# Altium PCB LM-004-A.PcbDoc (part 1 of 2)
Units mil, origin at the board's own origin, x right, y up, seen from the top; angles counter-clockwise.
Board outline 2155 x 3832 mil, 4 copper layers (Top Layer, Signal Layer 2, Signal Layer 1, Bottom Layer), stack 30.635 mil thick; 82 components, 124 nets, 382 pads, 75 vias.
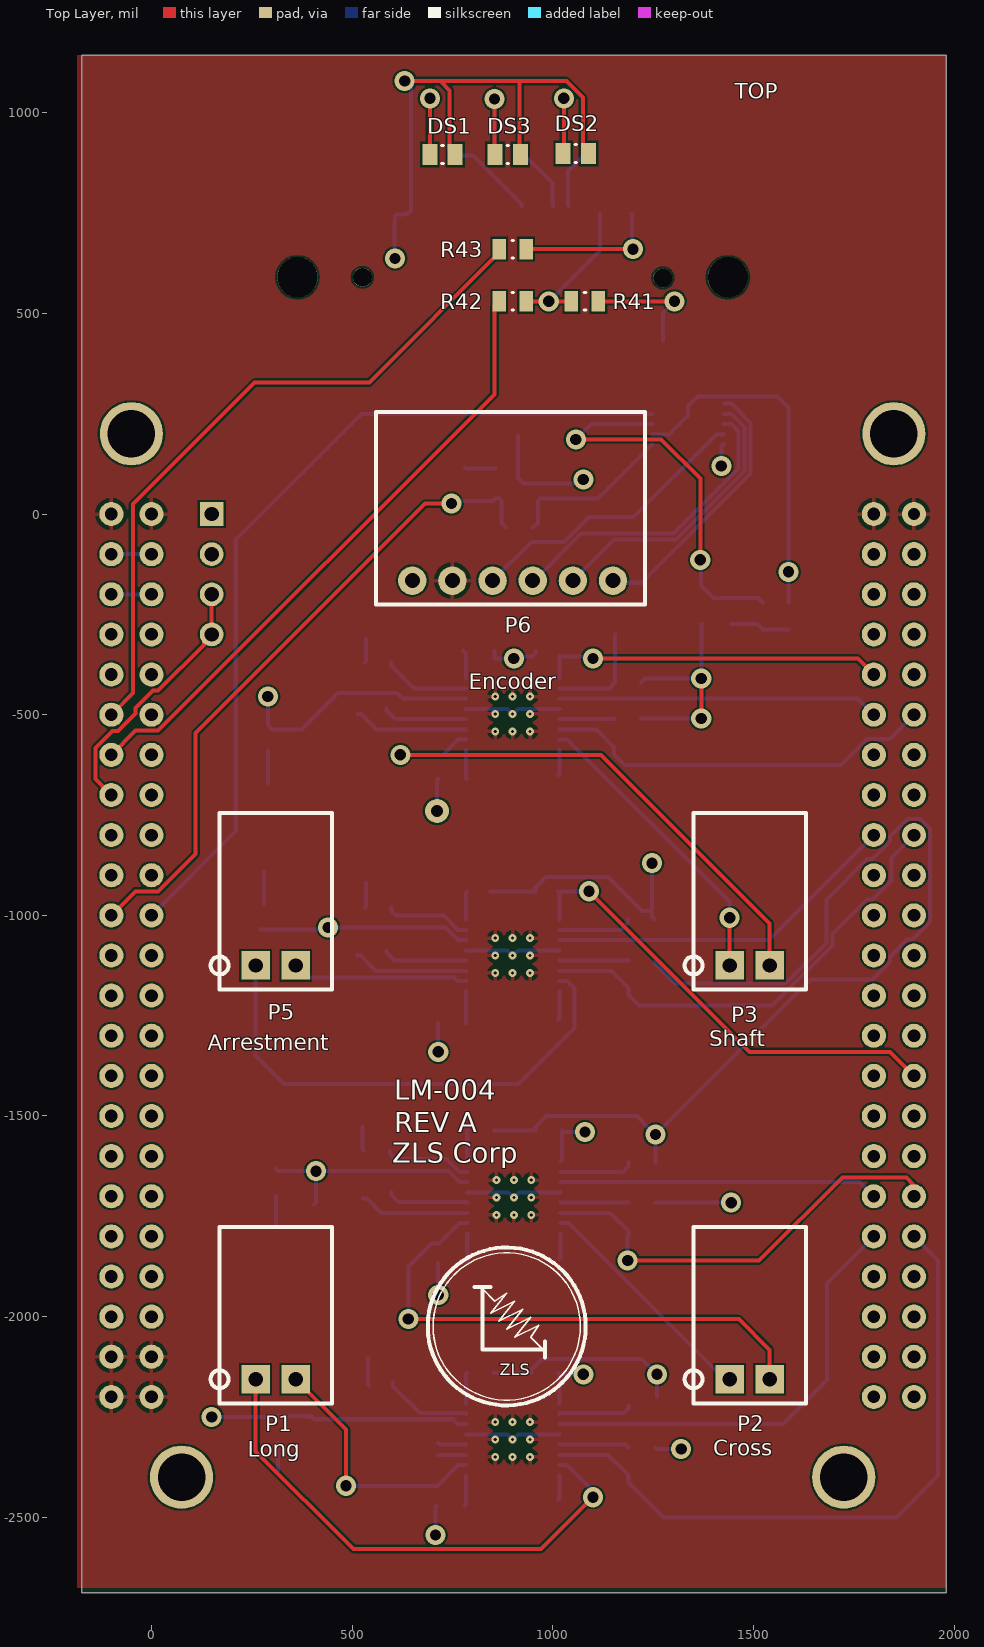
[diagram p0: Top Layer view]
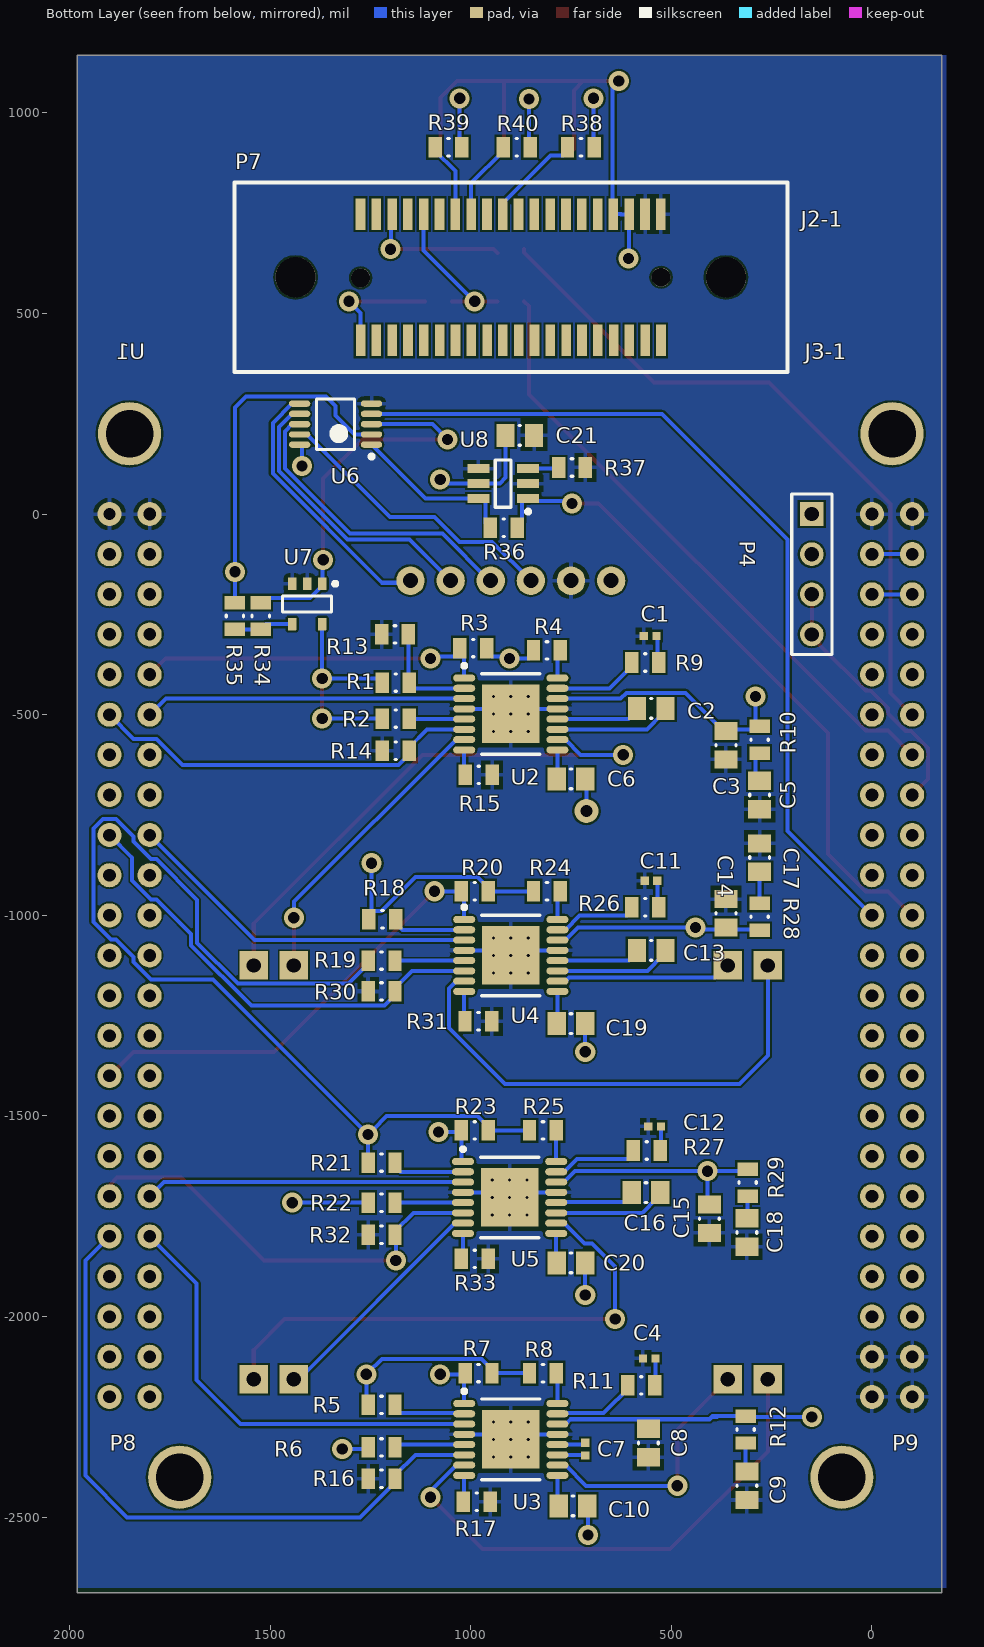
[diagram p1: Bottom Layer view, seen from below]
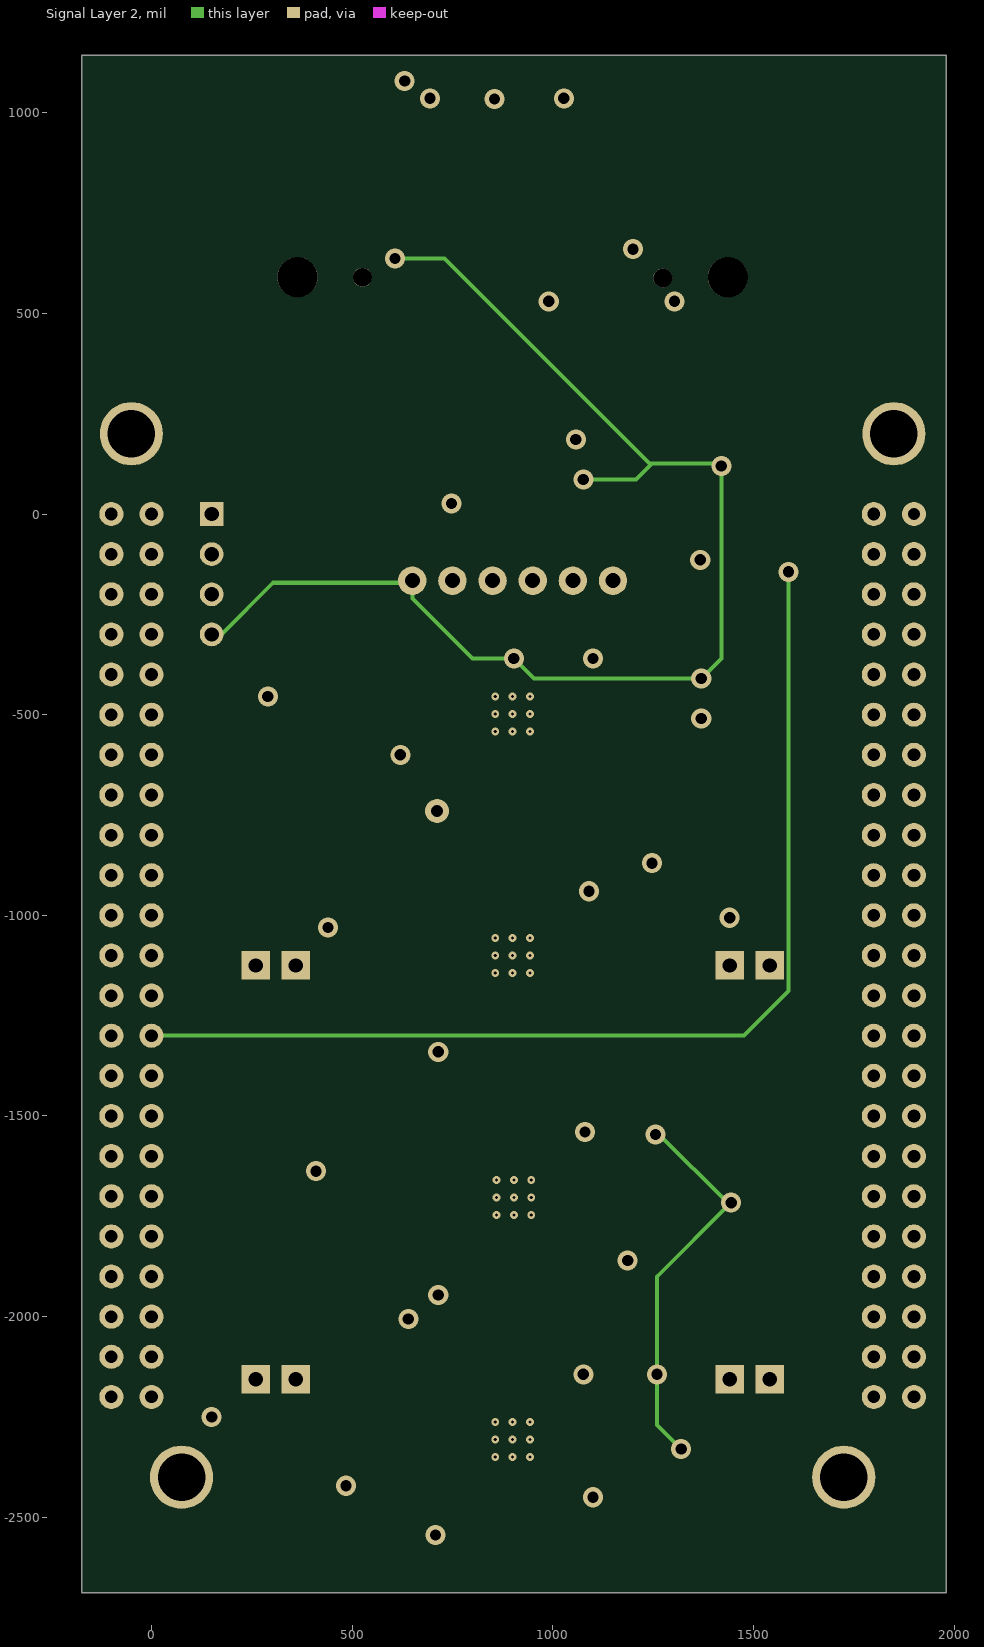
[diagram p2: Signal Layer 2]
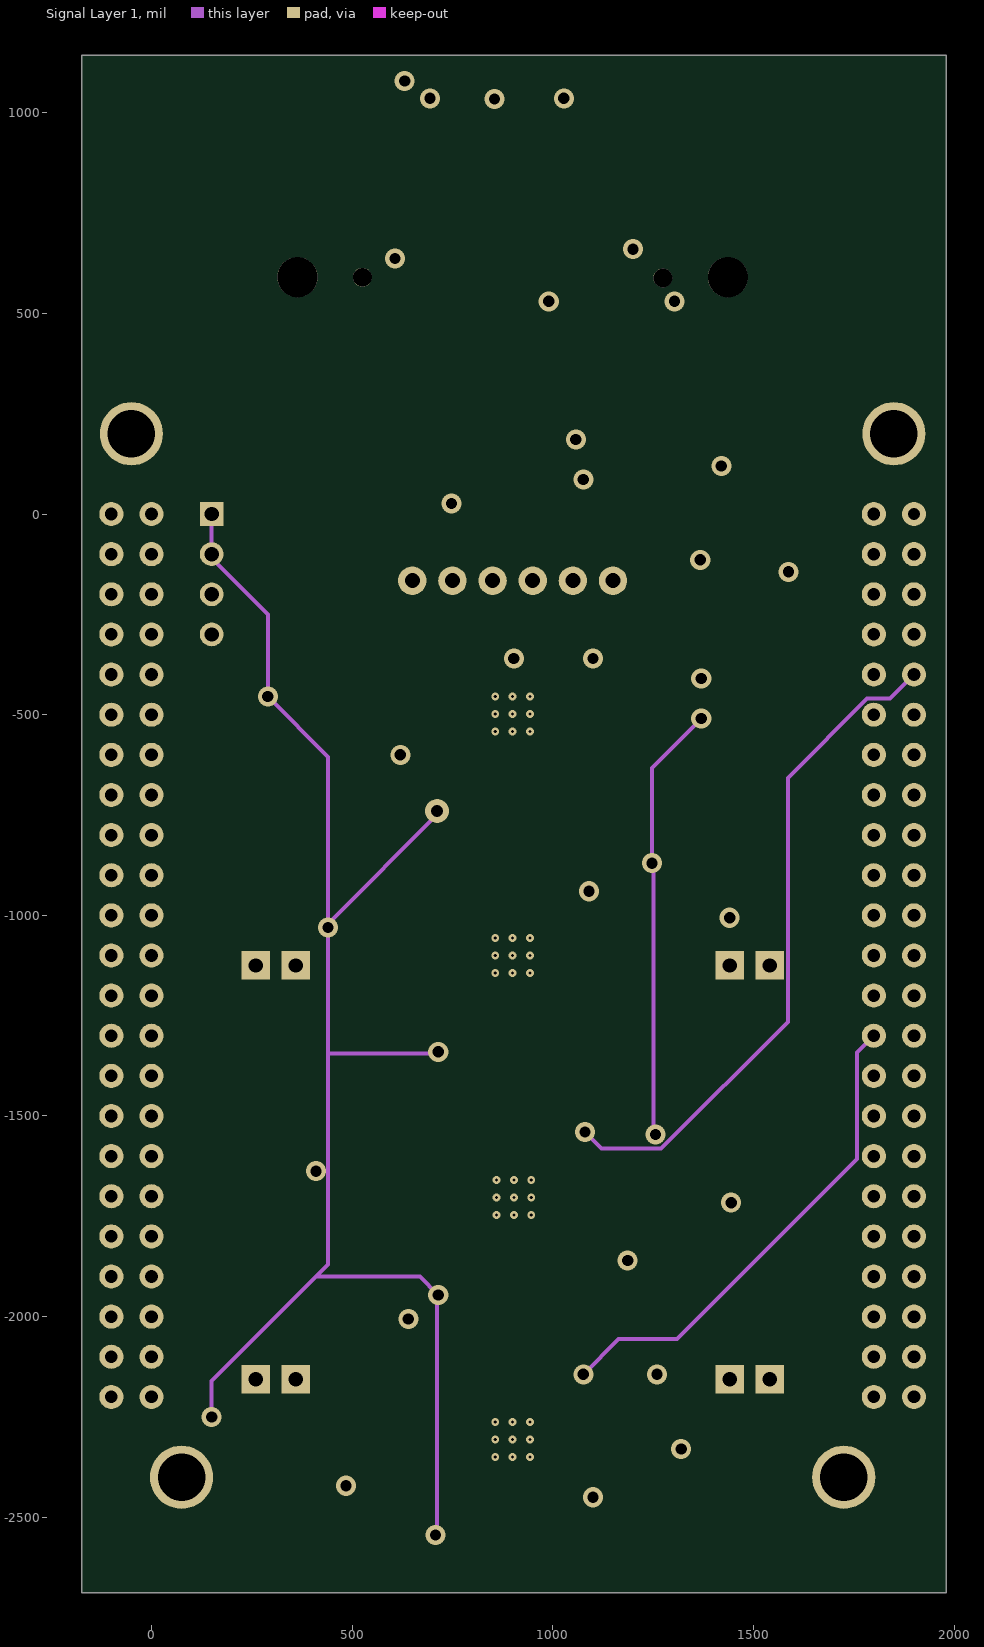
[diagram p3: Signal Layer 1]

## Layer stack, top to bottom
Top Solder: solder mask 0.4, Solder Resist, Dk 3.5
Top Layer: signal copper 1.4
Dielectric 1: core 10, FR-4, Dk 4.2
Signal Layer 2: signal copper 1.4173
Dielectric 4: prepreg 5, Dk 4.2
Signal Layer 1: signal copper 1.4173
Dielectric 3: core 10, Dk 4.2
Bottom Layer: signal copper 1.4
Bottom Solder: solder mask 0.4, Solder Resist, Dk 3.5

## Board outline
-174.24,-2688.39 1980.76,-2688.39 1980.76,1143.61 -174.24,1143.61

## Design rules (kind name [scope] priority, off if disabled: settings)
Clearance [All] p1: gap=5 ignorepadtopadclearanceinfootprint=FALSE
HoleSize [All] p1: absolutevalues=TRUE maxlimit=196.85 minlimit=1 maxpercent=80.000 minpercent=20.000
MinimumSolderMaskSliver [All] p1: minsoldermaskwidth=1.57
PolygonConnect [All] p1: connectstyle=Relief reliefconductorwidth=10 reliefentries=4 polygonreliefangle="90 Angle" airgapwidth=10
RoutingVias [All] p1: holewidth=28 width=50 viastyle="Through Hole" minholewidth=28 minwidth=50 maxholewidth=28 maxwidth=50
SilkToSolderMaskClearance [IsPad] p1: minsilkscreentomaskgap=3.94 clearancetoexposedcopper=TRUE
SolderMaskExpansion [All] p1: expansion=4
Width [All] p1: maxlimit=10 minlimit=10 preferedwidth=10
27 further rules are at their usual default settings.

## Classes and differential pairs
component class Encoder: C21 P6 R34 R35 R36 R37 U6 U7 U8
component class DC-Motor-DRV: C1 C2 C3 C4 C5 C6 C7 C8 C9 C10 C11 C12 C13 C14 C15 C16 C17 C18 C19 C20 R1 R2 R3 R4 R6 R7 R8 R9 R10 R11 R12 R13 R14 R15 R16 R17 R18 R19 R20 R21 R22 R23 R24 R25 R26 R27 R28 R29 R30 R31 R32 R33 U2 U3 U4 U5
component class BBB_Connections: P1 P2 P3 P4 P5 U1
component class Bluetooth: DS1 DS2 DS3 P7 R38 R39 R40 R41 R42 R43

## Components (designator, comment, footprint, x,y, rotation, side; value= is the part's Value field where it differs from the comment)
C1 "33nF" CAPC0402(1005)60_L 552.79,-304.01 r0 bottom
C2 "0.1uF" CAPC0805(2012)145_N 550,-484.2 r180 bottom
C3 "0.1uF" CAPC0805(2012)145_N 363.8,-576 r270 bottom
C4 "33nF" CAPC0402(1005)60_L 555.03,-2103.96 r0 bottom
C5 "4.7uF" CAPC0805(2012)145_N 280,-700 r270 bottom
C6 "0.1uF" CAPC0805(2012)145_N 750,-660 r180 bottom
C7 "CAP 1nF 25V 0402(1005)" CAPC0402(1005)60_L 714.57,-2330 r270 bottom value=1nF
C8 ".1uF" CAPC0805(2012)145_N 557.31,-2314.91 r270 bottom
C9 "4.7uF" CAPC0805(2012)145_N 311.86,-2421.44 r270 bottom
C10 ".1uF" CAPC0805(2012)145_N 745.03,-2471.44 r180 bottom
C11 "33nF" CAPC0402(1005)60_L 550.72,-914.01 r0 bottom
C12 "33nF" CAPC0402(1005)60_L 541.57,-1526 r0 bottom
C13 "CAP CER 0.1UF 25V X7R 0805" CAPC0805(2012)145_N 550,-1087.2 r180 bottom
C14 "CAP CER 0.1UF 25V X7R 0805" CAPC0805(2012)145_N 363.8,-994.76 r90 bottom
C15 "0.1uF" CAPC0805(2012)145_N 405.03,-1756 r270 bottom
C16 "0.1uF" CAPC0805(2012)145_N 563,-1691 r180 bottom
C17 "CAP CER 0.1UF 25V X7R 0805" CAPC0805(2012)145_N 280,-856 r90 bottom
C18 "4.7uF" CAPC0805(2012)145_N 311.86,-1790.31 r270 bottom
C19 "CAP CER 0.1UF 25V X7R 0805" CAPC0805(2012)145_N 750,-1270 r180 bottom
C20 "0.1uF" CAPC0805(2012)145_N 750,-1866 r180 bottom
C21 "CAP CER 0.1UF 25V X7R 0805" CAPC0805(2012)145_N 877.48,195.99 r180 bottom
DS1 "Lite-On LTST-S220KGKT Green LED, 571 nm 2012 (0805) Side View, Rectangle Lens SMD package" 0805C_L 725.24,895.99 r180 top
DS2 "Lite-On LTST-S220KGKT Green LED, 571 nm 2012 (0805) Side View, Rectangle Lens SMD package" 0805C_L 1057.48,898.23 r180 top
DS3 "Lite-On LTST-S220KGKT Green LED, 571 nm 2012 (0805) Side View, Rectangle Lens SMD package" 0805C_L 887.48,895.99 r180 top
P1 "IPL1-102-01-F-S-RA-K" IPL1-102-01-F-S-RA-K 309.45,-2156 r0 top
P2 "IPL1-102-01-F-S-RA-K" IPL1-102-01-F-S-RA-K 1490.55,-2156 r0 top locked
P3 "IPL1-102-01-F-S-RA-K" IPL1-102-01-F-S-RA-K 1490.55,-1124.9 r0 top locked
P4 "Header 4" HDR1X4 150,0 r270 bottom
P5 "IPL1-102-01-F-S-RA-K" IPL1-102-01-F-S-RA-K 309.45,-1124.9 r0 top locked
P6 "IPL1-106-01-L-S-RA-K" IPL1-106-01-L-S-RA-K 900,-166 r0 top locked
P7 "FSI-120-03-G-D-E-AB" FSI-120-03-G-D-E-AB 900,590 r180 bottom
R1 "10K" RESC0805(2012)_L 1186.54,-420 r180 bottom
R2 "10K" RESC0805(2012)_L 1186.54,-509.8 r180 bottom
R3 "10K" RESC0805(2012)_L 993.65,-334.01 r0 bottom
R4 "10K" RESC0805(2012)_L 810,-340 r180 bottom
R5 "10K" RESC0805(2012)_L 1222,-2219.98 r180 bottom
R6 "10K" RESC0805(2012)_L 1222,-2326 r180 bottom
R7 "10K" RESC0805(2012)_L 980.31,-2140.65 r0 bottom
R8 "10K" RESC0805(2012)_L 820,-2141 r180 bottom
R9 "10K" RESC0805(2012)_L 565.1,-370 r0 bottom
R10 "10K" RESC0805(2012)_L 280,-562.16 r270 bottom
R11 "10K" RESC0805(2012)_L 575.03,-2171.44 r0 bottom
R12 "10K" RESC0805(2012)_L 315.03,-2281.44 r270 bottom
R13 "DNP" RESC0805(2012)_L 1188.54,-300 r0 bottom
R14 "10K" RESC0805(2012)_L 1186.54,-590 r0 bottom
R15 "10K" RESC0805(2012)_L 980,-650 r180 bottom
R16 "10K" RESC0805(2012)_L 1222,-2403.96 r0 bottom
R17 "10K" RESC0805(2012)_L 985.03,-2461.44 r180 bottom
R18 "10K" RESC0805(2012)_L 1220,-1010 r180 bottom
R19 "10K" RESC0805(2012)_L 1222,-1112.8 r180 bottom
R20 "10K" RESC0805(2012)_L 990,-940 r0 bottom
R21 "10K" RESC0805(2012)_L 1222,-1616 r180 bottom
R22 "10K" RESC0805(2012)_L 1222,-1716 r180 bottom
R23 "10K" RESC0805(2012)_L 990,-1536 r0 bottom
R24 "10K" RESC0805(2012)_L 810,-940 r180 bottom
R25 "10K" RESC0805(2012)_L 820,-1536 r180 bottom
R26 "10K" RESC0805(2012)_L 565.1,-980 r0 bottom
R27 "10K" RESC0805(2012)_L 561.29,-1586 r0 bottom
R28 "10K" RESC0805(2012)_L 280,-1003.61 r90 bottom
R29 "10K" RESC0805(2012)_L 310,-1666 r270 bottom
R30 "10K" RESC0805(2012)_L 1222,-1189.57 r0 bottom
R31 "10K" RESC0805(2012)_L 980.69,-1264.01 r180 bottom
R32 "10K" RESC0805(2012)_L 1222,-1796 r0 bottom
R33 "10K" RESC0805(2012)_L 990,-1856 r180 bottom
R34 "10K" RESC0805(2012)_L 1523.24,-254.01 r90 bottom
R35 "10K" RESC0805(2012)_L 1587.48,-254.01 r270 bottom
R36 "DNP" RESC0805(2012)_L 917.48,-34.01 r0 bottom
R37 "43.2K" RESC0805(2012)_L 747.48,115.99 r180 bottom
R38 "3.9k" RESC0805(2012)_L 725.24,914 r180 bottom
R39 "3.9k" RESC0805(2012)_L 1055.24,914 r180 bottom
R40 "3.9k" RESC0805(2012)_L 885.24,914 r180 bottom
R41 "10K" RESC0805(2012)_L 1080,530 r180 top value=3.9k
R42 "100" RESC0805(2012)_L 900,530 r0 top value=3.9k
R43 "100" RESC0805(2012)_L 900,660 r0 top value=3.9k
U1 "BBB" "BEAGLEBONE BLACK MEZANINE" 900,-1100 r180 bottom locked
U2 "DRV8801PWPR" DRV8801PWPR 900,-498.18 r180 bottom
U3 "DRV8801PWPR" DRV8801PWPR 900,-2306 r180 bottom
U4 "DRV8801PWPR" DRV8801PWPR 900,-1100 r180 bottom locked
U5 "DRV8801PWPR" DRV8801PWPR 903,-1703 r180 bottom locked
U6 "MAX1484EUB+" MAX1486EUB+ 1336.65,224 r0 bottom
U7 "OPA188AIDBVT" DBV0005A_L 1407.48,-224.01 r270 bottom
U8 "LTC6994MPS6-2#TRMPBF" LTC6994MPS6-2#TRMPBF 918.98,75.99 r0 bottom

## Footprints (in the part's own frame and the unit in brackets; to place one, negate y for a bottom-side part, rotate by r counter-clockwise, add the part's x,y. Pads: shape width x height; smd on the part's side, far side on the other; paste and mask are expansions set on the pad)
0805C_L [mm]
  rect 0.95x1.35 smd: 1(-0.8,0) 2(0.8,0)
  silkscreen extent -0.05,-0.58 0.05,0.58, body extent -1.1,-0.72 1.1,0.72, height 0.75
"BEAGLEBONE BLACK MEZANINE" [mil]
  round 60 hole 31.5: 8-1(-900,1100) 8-3(-900,1000) 8-4(-1000,1000) 8-5(-900,900) 8-6(-1000,900) 8-7(-900,800) 8-8(-1000,800) 8-9(-900,700) 8-10(-1000,700) 8-11(-900,600) 8-12(-1000,600) 8-13(-900,500) 8-14(-1000,500) 8-15(-900,400) 8-16(-1000,400) 8-17(-900,300) 8-18(-1000,300) 8-19(-900,200) 8-20(-1000,200) 8-21(-900,100) 8-22(-1000,100) 8-23(-900,0) 8-24(-1000,0) 8-25(-900,-100) 8-26(-1000,-100) 8-27(-900,-200) 8-28(-1000,-200) 8-29(-900,-300) 8-30(-1000,-300) 8-31(-900,-400) 8-32(-1000,-400) 8-33(-900,-500) 8-34(-1000,-500) 8-35(-900,-600) 8-36(-1000,-600) 8-37(-900,-700) 8-38(-1000,-700) 8-39(-900,-800) 8-40(-1000,-800) 8-41(-900,-900) 8-42(-1000,-900) 8-43(-900,-1000) 8-44(-1000,-1000) 8-45(-900,-1100) 8-46(-1000,-1100) 9-1(1000,1100) 9-2(900,1100) 9-3(1000,1000) 9-4(900,1000) 9-5(1000,900) 9-6(900,900) 9-7(1000,800) 9-8(900,800) 9-9(1000,700) 9-10(900,700) 9-11(1000,600) 9-12(900,600) 9-13(1000,500) 9-14(900,500) 9-15(1000,400) 9-16(900,400) 9-17(1000,300) 9-18(900,300) 9-19(1000,200) 9-20(900,200) 9-21(1000,100) 9-22(900,100) 9-23(1000,0) 9-24(900,0) 9-25(1000,-100) 9-26(900,-100) 9-27(1000,-200) 9-28(900,-200) 9-29(1000,-300) 9-30(900,-300) 9-31(1000,-400) 9-32(900,-400) 9-33(1000,-500) 9-34(900,-500) 9-35(1000,-600) 9-36(900,-600) 9-37(1000,-700) 9-38(900,-700) 9-39(1000,-800) 9-40(900,-800) 9-41(1000,-900) 9-42(900,-900) 9-43(1000,-1000) 9-44(900,-1000) 9-45(1000,-1100) 9-46(900,-1100)
  round 60 hole 30 paste+0: 8-2(-1000,1100)
  round 157.48 hole 118.11 paste+0: ""(-950,1300)
  round 157.48 hole 118.11: ""(-825,-1300) ""(825,-1300) ""(950,1300)
  body extent -1047,-1163 1048,1157, height 335
CAPC0402(1005)60_L [mm] "Chip Capacitor, Body 1.0x0.5mm, Height 0.6mm, IPC High Density"
  rect 0.52x0.52 smd: 1(-0.4,0) 2(0.4,0)
  body extent -0.55,-0.3 0.55,0.3, height 0.6
CAPC0805(2012)145_N [mm] "Chip Capacitor, Body 2.0x1.2mm, Height 1.45mm, IPC Medium Density"
  rect 1.15x1.45 smd: 1(-0.9,0) 2(0.9,0)
  silkscreen extent -0.05,-0.63 0.05,0.63, body extent -1.1,-0.72 1.1,0.73, height 1.45
DBV0005A_L [mm] "SOT23, 5-Leads, Body 3.05x1.75mm, Pitch 0.95mm, IPC High Density"
  rrect18% 0.8x0.55 smd: 1(-1.275,0.95) 2(-1.275,0) 3(-1.275,-0.95) 4(1.275,-0.95) 5(1.275,0.95)
  silkscreen extent -1.4,-1.55 0.5,1.9, body extent -1.42,-1.46 1.42,1.46, height 1.08
DRV8801PWPR [mm] "IC MOTOR DRIVER PAR 16HTSSOP"
  oval 1.4x0.45 smd: 1(-2.95,2.275) 2(-2.95,1.625) 3(-2.95,0.975) 4(-2.95,0.325) 5(-2.95,-0.325) 6(-2.95,-0.975) 7(-2.95,-1.625) 8(-2.95,-2.275) 9(2.95,-2.275) 10(2.95,-1.625) 11(2.95,-0.975) 12(2.95,-0.325) 13(2.95,0.325) 14(2.95,0.975) 15(2.95,1.625) 16(2.95,2.275)
  rect 3.65x3.7 smd: 17(0,0)
  silkscreen extent -3.08,-2.55 1.85,3.17, body extent -3.2,-2.55 3.2,2.55, height 1.2
FSI-120-03-G-D-E-AB [mil]
  round 100 hole 100: hole(-536.2,0) hole(536.2,0)
  round 47 hole 47: hole(-374.3,-1.6) hole(374.3,0)
  rect 24x78.74 smd: J2-1(373.91,157.36) J2-2(334.51,157.36) J2-3(295.11,157.36) J2-4(255.71,157.36) J2-5(216.31,157.36) J2-6(176.91,157.36) J2-7(137.51,157.36) J2-8(98.11,157.36) J2-9(58.71,157.36) J2-10(19.31,157.36) J2-11(-20.09,157.36) J2-12(-59.49,157.36) J2-13(-98.89,157.36) J2-14(-138.29,157.36) J2-15(-177.69,157.36) J2-16(-217.09,157.36) J2-17(-256.49,157.36) J2-18(-295.89,157.36) J2-19(-335.29,157.36) J2-20(-374.69,157.36) J3-1(374.3,-157.36) J3-2(334.9,-157.36) J3-3(295.5,-157.36) J3-4(256.1,-157.36) J3-5(216.7,-157.36) J3-6(177.3,-157.36) J3-7(137.9,-157.36) J3-8(98.5,-157.36) J3-9(59.1,-157.36) J3-10(19.7,-157.36) J3-11(-19.7,-157.36) J3-12(-59.1,-157.36) J3-13(-98.5,-157.36) J3-14(-137.9,-157.36) J3-15(-177.3,-157.36) J3-16(-216.7,-157.36) J3-17(-256.1,-157.36) J3-18(-295.5,-157.36) J3-19(-334.9,-157.36) J3-20(-374.3,-157.36)
  silkscreen extent -689,-236 689,236, body extent -633,-179 710,188, height 162
HDR1X4 [mm] "Connector; Header; 4 Position"
  rect 1.5x1.5 hole 0.9: 1(0,0)
  round 1.5 hole 0.9: 2(2.54,0) 3(5.08,0) 4(7.62,0)
  silkscreen extent -1.27,-1.27 8.89,1.27
IPL1-102-01-F-S-RA-K [mm] ".100 TERMINAL ASSEMBLY"
  rect 1.8x1.8 hole 0.91: 1(-1.27,0) 2(1.27,0)
  silkscreen extent -4.12,-1.52 3.56,9.65, body extent -3.3,-0.32 3.3,9.4, height 6.56
IPL1-106-01-L-S-RA-K [mm]
  round 1.8 hole 0.95: 1(-6.35,0) 2(-3.81,0) 3(-1.27,0) 4(1.27,0) 5(3.81,0) 6(6.35,0)
  silkscreen extent -8.64,-1.52 8.38,10.67, body extent -8.38,-0.25 8.38,10.41, height 6.56
LTC6994MPS6-2#TRMPBF [mm] "SOT23, 6-Leads, Body 2.90x3.23mm, Pitch 0.95mm, IPC Medium Density"
  rect 1.4x0.55 smd: 1(-1.575,0.95) 2(-1.575,0) 3(-1.575,-0.95) 4(1.575,-0.95) 5(1.575,0) 6(1.575,0.95)
  silkscreen extent -1.7,-1.5 0.5,1.9, body extent -1.93,-1.5 1.92,1.5, height 1
MAX1486EUB+ [mm]
  oval 1.35x0.4 smd: 1(-2.275,1.3) 2(-2.275,0.65) 3(-2.275,0) 4(-2.275,-0.65) 5(-2.275,-1.3) 6(2.275,-1.3) 7(2.275,-0.65) 8(2.275,0) 9(2.275,0.65) 10(2.275,1.3)
  silkscreen extent -2.4,-1.6 1.2,2.17, body extent -2.45,-1.6 2.45,1.6, height 1.09
RESC0805(2012)_L [mm] "Chip Resistor, Body 2.0x1.3mm, IPC High Density"
  rect 0.85x1.3 smd: 1(-0.85,0) 2(0.85,0)
  silkscreen extent -0.05,-0.55 0.05,0.55, body extent -1.1,-0.67 1.1,0.68, height 0.7

## Part data
C1 C11: library part CMP-1034-00252-1, "CAP CER 0.1UF 10V X7R 0402", Manufacturer="Murata Electronics North America", Manufacturer Part Number=GRM155R71A104KA01D, Operating Temperature="-55°C ~ 125°C", Package / Case="0402 (1005 Metric)", Ratings=-, Supplier Part Number 1=490-6321-1-ND, Temperature Coefficient=X7R, Tolerance=±10%, Voltage - Rated=10V, Applications="General Purpose", Category=Capacitors, ComponentLink1Description=http://www.murata.com/~/media/webrenewal/support/library/catalog/products/capacitor/mlcc/c02e.ashx?la=en-us, ComponentLink1URL=http://www.murata.com/~/media/webrenewal/support/library/catalog/products/capacitor/mlcc/c02e.ashx?la=en-us, Features=-, Height - Seated (Max)=-, Lead Spacing=-, Mounting Type="Surface Mount, MLCC", Packaging="Cut Tape (CT)", Part Status=Active, Pricing 1="1=0.1, 10=0.014, 100=0.0063, 500=0.00446, 1000=0.00351, 2500=0.00319, 5000=0.00293 (USD)", RoHS="RoHS Compliant", Size / Dimension="0.039\" L x 0.020\" W (1.00mm x 0.50mm)", Stock 1=2920395, Supplier 1=Digi-Key, Thickness (Max)="0.022\" (0.55mm)"
C2 C3 C6 C8 C10 C15 C16 C20: library part CMP-1036-04795-1, "CAP CER 0.1UF 25V X7R 0805", Capacitance=0.1µF, Manufacturer="Murata Electronics North America", Manufacturer Part Number=GRM21BR71E104KA01L, Operating Temperature="-55°C ~ 125°C", Package / Case="0805 (2012 Metric)", Ratings=-, Supplier Part Number 1=490-1673-6-ND, Temperature Coefficient=X7R, Tolerance=±10%, Voltage - Rated=25V, Applications="General Purpose", Category=Capacitors, ComponentLink1Description=http://www.murata.com/~/media/webrenewal/support/library/catalog/products/capacitor/mlcc/c02e.ashx, ComponentLink1URL=http://www.murata.com/~/media/webrenewal/support/library/catalog/products/capacitor/mlcc/c02e.ashx, Features=-, Height - Seated (Max)=-, Lead Spacing=-, Lead Style=-, Mounting Type="Surface Mount, MLCC", Packaging=Digi-Reel®, Part Status=Active, Pricing 1="1=0.2, 10=0.145, 100=0.0683, 500=0.04788, 1000=0.03964 (USD)", RoHS="RoHS Compliant", Size / Dimension="0.079\" L x 0.049\" W (2.00mm x 1.25mm)", Stock 1=891652, Supplier 1=Digi-Key, Thickness (Max)="0.053\" (1.35mm)"
C4: library part CMP-1034-00252-1, "CAP CER 33UF 10V X7R 0402", Manufacturer="Murata Electronics North America", Manufacturer Part Number=GRM155R71A104KA01D, Operating Temperature="-55°C ~ 125°C", Package / Case="0402 (1005 Metric)", Ratings=-, Supplier Part Number 1=490-6321-1-ND, Temperature Coefficient=X7R, Tolerance=±10%, Voltage - Rated=10V, Applications="General Purpose", Category=Capacitors, ComponentLink1Description=http://www.murata.com/~/media/webrenewal/support/library/catalog/products/capacitor/mlcc/c02e.ashx?la=en-us, ComponentLink1URL=http://www.murata.com/~/media/webrenewal/support/library/catalog/products/capacitor/mlcc/c02e.ashx?la=en-us, Features=-, Height - Seated (Max)=-, Lead Spacing=-, Mounting Type="Surface Mount, MLCC", Packaging="Cut Tape (CT)", Part Status=Active, Pricing 1="1=0.1, 10=0.014, 100=0.0063, 500=0.00446, 1000=0.00351, 2500=0.00319, 5000=0.00293 (USD)", RoHS="RoHS Compliant", Size / Dimension="0.039\" L x 0.020\" W (1.00mm x 0.50mm)", Stock 1=2920395, Supplier 1=Digi-Key, Thickness (Max)="0.022\" (0.55mm)"
C5: library part CMP-1036-04795-1, "CAP CER 4.7UF 25V 10% X7R 0805", Capacitance=4.7µF, Manufacturer="Murata Electronics North America", Manufacturer Part Number=GRM21BR71E104KA01L, Operating Temperature="-55°C ~ 125°C", Package / Case="0805 (2012 Metric)", Ratings=-, Supplier Part Number 1=490-1673-6-ND, Temperature Coefficient=X7R, Tolerance=±10%, Voltage - Rated=25V, Applications="General Purpose", Category=Capacitors, ComponentLink1Description=http://www.murata.com/~/media/webrenewal/support/library/catalog/products/capacitor/mlcc/c02e.ashx, ComponentLink1URL=http://www.murata.com/~/media/webrenewal/support/library/catalog/products/capacitor/mlcc/c02e.ashx, Features=-, Height - Seated (Max)=-, Lead Spacing=-, Lead Style=-, Mounting Type="Surface Mount, MLCC", Packaging=Digi-Reel®, Part Status=Active, Pricing 1="1=0.2, 10=0.145, 100=0.0683, 500=0.04788, 1000=0.03964 (USD)", RoHS="RoHS Compliant", Size / Dimension="0.079\" L x 0.049\" W (2.00mm x 1.25mm)", Stock 1=891652, Supplier 1=Digi-Key, Thickness (Max)="0.053\" (1.35mm)"
C7: library part CMP-1034-01622-1, "CAP 1nF 25V ±10% 0402 (1005 Metric) Thickness 0.6mm SMD", Case-EIA=0402, Case-Metric=1005, Rated Voltage="25 V", Tolerance=±10%, Max Thickness="0.6 mm", Technology=SMT
C9 C18: library part CMP-1036-04795-1, "CAP CER 4.7UF 25V X7R 0805", Capacitance=4.7µF, Manufacturer="Murata Electronics North America", Manufacturer Part Number=GRM21BR71E104KA01L, Operating Temperature="-55°C ~ 125°C", Package / Case="0805 (2012 Metric)", Ratings=-, Supplier Part Number 1=490-1673-6-ND, Temperature Coefficient=X7R, Tolerance=±10%, Voltage - Rated=25V, Applications="General Purpose", Category=Capacitors, ComponentLink1Description=http://www.murata.com/~/media/webrenewal/support/library/catalog/products/capacitor/mlcc/c02e.ashx, ComponentLink1URL=http://www.murata.com/~/media/webrenewal/support/library/catalog/products/capacitor/mlcc/c02e.ashx, Features=-, Height - Seated (Max)=-, Lead Spacing=-, Lead Style=-, Mounting Type="Surface Mount, MLCC", Packaging=Digi-Reel®, Part Status=Active, Pricing 1="1=0.2, 10=0.145, 100=0.0683, 500=0.04788, 1000=0.03964 (USD)", RoHS="RoHS Compliant", Size / Dimension="0.079\" L x 0.049\" W (2.00mm x 1.25mm)", Stock 1=891652, Supplier 1=Digi-Key, Thickness (Max)="0.053\" (1.35mm)"
C12: library part CMP-1034-00252-1, "CAP CER 3.3UF 10V X7R 0402", Manufacturer="Murata Electronics North America", Manufacturer Part Number=GRM155R71A104KA01D, Operating Temperature="-55°C ~ 125°C", Package / Case="0402 (1005 Metric)", Ratings=-, Supplier Part Number 1=490-6321-1-ND, Temperature Coefficient=X7R, Tolerance=±10%, Voltage - Rated=10V, Applications="General Purpose", Category=Capacitors, ComponentLink1Description=http://www.murata.com/~/media/webrenewal/support/library/catalog/products/capacitor/mlcc/c02e.ashx?la=en-us, ComponentLink1URL=http://www.murata.com/~/media/webrenewal/support/library/catalog/products/capacitor/mlcc/c02e.ashx?la=en-us, Features=-, Height - Seated (Max)=-, Lead Spacing=-, Mounting Type="Surface Mount, MLCC", Packaging="Cut Tape (CT)", Part Status=Active, Pricing 1="1=0.1, 10=0.014, 100=0.0063, 500=0.00446, 1000=0.00351, 2500=0.00319, 5000=0.00293 (USD)", RoHS="RoHS Compliant", Size / Dimension="0.039\" L x 0.020\" W (1.00mm x 0.50mm)", Stock 1=2920395, Supplier 1=Digi-Key, Thickness (Max)="0.022\" (0.55mm)"
C13 C14 C19 C21: library part CMP-1036-04795-1, Capacitance=0.1µF, Manufacturer="Murata Electronics North America", Manufacturer Part Number=GRM21BR71E104KA01L, Operating Temperature="-55°C ~ 125°C", Package / Case="0805 (2012 Metric)", Ratings=-, Supplier Part Number 1=490-1673-6-ND, Temperature Coefficient=X7R, Tolerance=±10%, Voltage - Rated=25V, Applications="General Purpose", Category=Capacitors, ComponentLink1Description=http://www.murata.com/~/media/webrenewal/support/library/catalog/products/capacitor/mlcc/c02e.ashx, ComponentLink1URL=http://www.murata.com/~/media/webrenewal/support/library/catalog/products/capacitor/mlcc/c02e.ashx, Features=-, Height - Seated (Max)=-, Lead Spacing=-, Lead Style=-, Mounting Type="Surface Mount, MLCC", Packaging=Digi-Reel®, Part Status=Active, Pricing 1="1=0.2, 10=0.145, 100=0.0683, 500=0.04788, 1000=0.03964 (USD)", RoHS="RoHS Compliant", Size / Dimension="0.079\" L x 0.049\" W (2.00mm x 1.25mm)", Stock 1=891652, Supplier 1=Digi-Key, Thickness (Max)="0.053\" (1.35mm)"
C17: library part CMP-1036-04795-1, "CAP CER 0.47UF 25V X7R 0805", Capacitance=4.7µF, Manufacturer="Murata Electronics North America", Manufacturer Part Number=GRM21BR71E104KA01L, Operating Temperature="-55°C ~ 125°C", Package / Case="0805 (2012 Metric)", Ratings=-, Supplier Part Number 1=490-1673-6-ND, Temperature Coefficient=X7R, Tolerance=±10%, Voltage - Rated=25V, Applications="General Purpose", Category=Capacitors, ComponentLink1Description=http://www.murata.com/~/media/webrenewal/support/library/catalog/products/capacitor/mlcc/c02e.ashx, ComponentLink1URL=http://www.murata.com/~/media/webrenewal/support/library/catalog/products/capacitor/mlcc/c02e.ashx, Features=-, Height - Seated (Max)=-, Lead Spacing=-, Lead Style=-, Mounting Type="Surface Mount, MLCC", Packaging=Digi-Reel®, Part Status=Active, Pricing 1="1=0.2, 10=0.145, 100=0.0683, 500=0.04788, 1000=0.03964 (USD)", RoHS="RoHS Compliant", Size / Dimension="0.079\" L x 0.049\" W (2.00mm x 1.25mm)", Stock 1=891652, Supplier 1=Digi-Key, Thickness (Max)="0.053\" (1.35mm)"
DS1 DS2 DS3: library part "LED A/K", Case/Package=0805, Case Code (Metric)=2012, Colour=Green, Forward Current=20mA, Forward Voltage=2V, Lens Colour=Colorless, Manufacturer="Vishay / Lite-On", Manufacturer Part Number=LTST-S220KGKT, Max Operating Temperature=85°C, Min Operating Temperature=-55°C, Package Quantity=4000, Power Dissipation=75W, Power Rating=75mW, Supplier Part Number 1=160-1468-1-ND, Case Code (Imperial)=0805, ComponentLink1Description=https://datasheet.ciiva.com/11775/0900766b80dc0b70-11775441.pdf, ComponentLink1URL=https://datasheet.ciiva.com/11775/0900766b80dc0b70-11775441.pdf, ComponentLink2Description=https://datasheet.ciiva.com/2110/s-110-ltst-s220kgkt-2110069.pdf, ComponentLink2URL=https://datasheet.ciiva.com/2110/s-110-ltst-s220kgkt-2110069.pdf, ComponentLink3Description=https://datasheet.ciiva.com/2110/s-110-ltst-s220kgkt-2110070.pdf, ComponentLink3URL=https://datasheet.ciiva.com/2110/s-110-ltst-s220kgkt-2110070.pdf, ComponentLink4Description=https://datasheet.ciiva.com/12400/100-ltst-s220kgkt-59602-12400886.pdf, ComponentLink4URL=https://datasheet.ciiva.com/12400/100-ltst-s220kgkt-59602-12400886.pdf, ComponentLink5Description=https://datasheet.ciiva.com/2110/s-110-ltst-s220kgkt-2110071.pdf, ComponentLink5URL=https://datasheet.ciiva.com/2110/s-110-ltst-s220kgkt-2110071.pdf, ComponentLink6Description=https://datasheet.ciiva.com/16379/ltst-s220kgkt-16379082.pdf, ComponentLink6URL=https://datasheet.ciiva.com/16379/ltst-s220kgkt-16379082.pdf, ComponentLink7Description=http://www.farnell.com/cad/2124774.pdf, ComponentLink7URL=http://www.farnell.com/cad/2124774.pdf, ComponentLink8Description=http://www.farnell.com/datasheets/693084.pdf, ComponentLink8URL=http://www.farnell.com/datasheets/693084.pdf, Depth=0.6mm, Dominant Wavelength=568nm, Height=0.6mm, Illumination Colour=Green, Lead Free="Lead Free", Length=2.1mm, Lens Style=Diffused,Colorless, Lens Transparency=Clear, Luminous Intensity=35mcd, Mount="Surface Mount", Number of Elements=1, Number of LEDs=1, Number of Pins=2, Packaging="Tape and Reel", Pricing 1="1=0.29, 10=0.212, 25=0.1564, 100=0.1117, 250=0.0759, 500=0.067, 1000=0.0525 (USD)", Pricing 2="1=0.325, 10=0.317, 100=0.23, 200=0.228, 400=0.182, 900=0.147, 3000=0.114, 9000=0.107 (GBP)", Radiation Hardening=No, RoHS=YES, Stock 1=74800, Stock 2=2271, Supplier 1=Digi-Key, Supplier 2=Farnell, Supplier Part Number 2=2062310, Test Current=20mA, Viewing Angle=130°, Wavelength=574nm, Width=1mm
P1 P2 P3 P5: Current Rating=-, Insulation Color=Natural, Manufacturer="Samtec Inc.", Material Flammability Rating="UL94 V-0", Operating Temperature="-55°C ~ 125°C", Supplier Part Number 1=IPL1-102-01-F-S-RA-K-ND, Voltage Rating="675VAC, 954VDC", Applications=-, Category="Connectors, Interconnects", ComponentLink1Description=http://suddendocs.samtec.com/prints/ipl1-1xx-xx-xxx-s-xx-x-xx-mkt.pdf, ComponentLink1URL=http://suddendocs.samtec.com/prints/ipl1-1xx-xx-xxx-s-xx-x-xx-mkt.pdf, Connector Type=Header, Contact Finish - Mating=Gold, Contact Finish - Post=Tin, Contact Finish Thickness - Mating="3.00µin (0.076µm)", Contact Finish Thickness - Post=-, Contact Length - Mating="0.215\" (5.46mm)", Contact Length - Post="0.085\" (2.16mm)", Contact Material="Phosphor Bronze", Contact Shape=Square, Contact Type="Male Pin", Fastening Type="Locking Ramp", Features=-, Ingress Protection=-, Insulation Height="0.240\" (6.10mm)", Insulation Material="Liquid Crystal Polymer (LCP)", Manufacturer Part Number=IPL1-102-01-F-S-RA-K, Mated Stacking Heights=-, Mounting Type="Through Hole, Right Angle", Number of Positions=2, Number of Positions Loaded=All, Number of Rows=1, Overall Contact Length=-, Packaging=Tube, Part Status=Active, Pitch - Mating="0.100\" (2.54mm)", Pricing 1="1=2.09 (USD)", RoHS="RoHS Compliant", Row Spacing - Mating=-, Shrouding="Shrouded - 4 Wall", Stock 1=0, Style="Board to Cable/Wire", Supplier 1=Digi-Key, Termination=Solder
P4: "Header, 4-Pin", LatestRevisionDate=17-Jul-2002, LatestRevisionNote="Re-released for DXP Platform.", Publisher="Altium Limited"
P6: library part "Header 6", "Header, 6-Pin", Current Rating=-, Insulation Color=Natural, Manufacturer="Samtec Inc.", Material Flammability Rating="UL94 V-0", Operating Temperature="-55°C ~ 125°C", Supplier Part Number 1=SAM9602-ND, Voltage Rating="675VAC, 954VDC", Applications=-, Category="Connectors, Interconnects", ComponentLink1Description=http://suddendocs.samtec.com/prints/ipl1-1xx-xx-xxx-s-xx-x-xx-mkt.pdf, ComponentLink1URL=http://suddendocs.samtec.com/prints/ipl1-1xx-xx-xxx-s-xx-x-xx-mkt.pdf, Connector Type=Header, Contact Finish - Mating=Gold, Contact Finish - Post=Tin, Contact Finish Thickness - Mating="10.0µin (0.25µm)", Contact Finish Thickness - Post=-, Contact Length - Mating="0.215\" (5.46mm)", Contact Length - Post="0.085\" (2.16mm)", Contact Material="Phosphor Bronze", Contact Shape=Square, Contact Type="Male Pin", Fastening Type="Locking Ramp", Features=-, Ingress Protection=-, Insulation Height="0.240\" (6.10mm)", Insulation Material="Liquid Crystal Polymer (LCP)", Manufacturer Part Number=IPL1-106-01-L-S-RA-K, Mated Stacking Heights=-, Mounting Type="Through Hole, Right Angle", Number of Positions=6, Number of Positions Loaded=All, Number of Rows=1, Overall Contact Length=-, Packaging=Tube, Part Status=Active, Pitch - Mating="0.100\" (2.54mm)", Pricing 1="1=2.73, 34=2.39794, 102=2.18, 510=1.853, 1020=1.5805, 5032=1.417 (USD)", RoHS="RoHS Compliant", Row Spacing - Mating=-, Shrouding="Shrouded - 4 Wall", Stock 1=6, Style="Board to Cable/Wire", Supplier 1=Digi-Key, Termination=Solder
R1 R2 R3 R4 R5 R6 R7 R8 R9 R11 R13 R14 R15 R16 R17 R18 R19 R20 R21 R22 R23 R24 R25 R26 R27 R30 R31 R32 R33 R34 R35: library part CMP-1013-00215-1, "RES SMD 10K OHM 1% 1/8W 0805", Manufacturer="Vishay Dale", Manufacturer Part Number=CRCW080510K0FKEA, Operating Temperature="-55°C ~ 155°C", Package / Case="0805 (2012 Metric)", Power (Watts)="0.125W, 1/8W", Supplier Device Package=0805, Supplier Part Number 1=541-10.0KCCT-ND, Temperature Coefficient=±100ppm/°C, Tolerance=±1%, Category=Resistors, ComponentLink1Description=http://www.vishay.com/docs/20035/dcrcwe3.pdf, ComponentLink1URL=http://www.vishay.com/docs/20035/dcrcwe3.pdf, Composition="Thick Film", Failure Rate=-, Features="Automotive AEC-Q200", Height - Seated (Max)="0.020\" (0.50mm)", Packaging="Cut Tape (CT)", Part Status=Active, Pricing 1="1=0.1, 10=0.055, 100=0.0223, 1000=0.01003, 2500=0.0087 (USD)", RoHS="RoHS Compliant", Size / Dimension="0.079\" L x 0.049\" W (2.00mm x 1.25mm)", Stock 1=1104982, Supplier 1=Digi-Key
R10 R12 R28 R29: library part CMP-1013-00215-1, "RES SMD 1R OHM 1% 1/8W 0805", Manufacturer="Vishay Dale", Manufacturer Part Number=CRCW080510K0FKEA, Operating Temperature="-55°C ~ 155°C", Package / Case="0805 (2012 Metric)", Power (Watts)="0.125W, 1/8W", Supplier Device Package=0805, Supplier Part Number 1=541-10.0KCCT-ND, Temperature Coefficient=±100ppm/°C, Tolerance=±1%, Category=Resistors, ComponentLink1Description=http://www.vishay.com/docs/20035/dcrcwe3.pdf, ComponentLink1URL=http://www.vishay.com/docs/20035/dcrcwe3.pdf, Composition="Thick Film", Failure Rate=-, Features="Automotive AEC-Q200", Height - Seated (Max)="0.020\" (0.50mm)", Packaging="Cut Tape (CT)", Part Status=Active, Pricing 1="1=0.1, 10=0.055, 100=0.0223, 1000=0.01003, 2500=0.0087 (USD)", RoHS="RoHS Compliant", Size / Dimension="0.079\" L x 0.049\" W (2.00mm x 1.25mm)", Stock 1=1104982, Supplier 1=Digi-Key
R36: library part CMP-1013-00215-1, "RES SMD 0 OHM 5% 1/8W 0805"
R37: library part CMP-1013-00215-1, "RES SMD 43.2K OHM 1% 1/8W 0805", Manufacturer="Vishay Dale", Manufacturer Part Number=CRCW080543K2FKEA, Operating Temperature="-55°C ~ 155°C", Package / Case="0805 (2012 Metric)", Power (Watts)="0.125W, 1/8W", Supplier Device Package=0805, Supplier Part Number 1=541-43.2KCCT-ND, Temperature Coefficient=±100ppm/°C, Tolerance=±1%, Category=Resistors, ComponentLink1Description=http://www.vishay.com/docs/20035/dcrcwe3.pdf, ComponentLink1URL=http://www.vishay.com/docs/20035/dcrcwe3.pdf, Composition="Thick Film", Failure Rate=-, Features="Automotive AEC-Q200", Height - Seated (Max)="0.020\" (0.50mm)", Packaging="Cut Tape (CT)", Part Status=Active, Pricing 1="1=0.1, 10=0.055, 100=0.0223, 1000=0.01003, 2500=0.0087 (USD)", RoHS="RoHS Compliant", Size / Dimension="0.079\" L x 0.049\" W (2.00mm x 1.25mm)", Stock 1=68577, Supplier 1=Digi-Key
R38 R39 R40 R41 R42 R43: library part CMP-1013-00215-1, "2R55 0.125W 1% 0805 (2012 Metric)  SMD", Case-EIA=0805, Case-Metric=2012, Power="0.125 W", Tolerance="1 %", Technology=SMT
U1: library part Beaglebone_Black_Mezanine, "Beaglebone Black"
U2 U3 U4 U5: "IC MOTOR DRIVER PAR 16HTSSOP", Base Part Number=DRV8801, Current - Output=2.8A, Manufacturer="Texas Instruments", Operating Temperature="-40°C ~ 150°C (TJ)", Package / Case="16-TSSOP (0.173\", 4.40mm Width) Exposed Pad", Supplier Device Package=16-HTSSOP, Supplier Part Number 1=296-25378-1-ND, Voltage - Load="8 V ~ 38 V", Applications="General Purpose", Category="Integrated Circuits (ICs)", ComponentLink1Description=http://www.ti.com/lit/ds/symlink/drv8801.pdf, ComponentLink1URL=http://www.ti.com/lit/ds/symlink/drv8801.pdf, Function="Driver - Fully Integrated, Control and Power Stage", Interface=Parallel, Manufacturer Part Number=DRV8801PWPR, Motor Type - AC, DC="Brushed DC", Motor Type - Stepper=Bipolar, Mounting Type="Surface Mount", Output Configuration="Half Bridge (2)", Packaging="Cut Tape (CT)", Part Status=Active, Pricing 1="1=2.11, 10=1.892, 100=1.5204, 500=1.24914, 1000=1.035 (USD)", RoHS="RoHS Compliant", Step Resolution=-, Stock 1=44037, Supplier 1=Digi-Key, Technology=DMOS, Voltage - Supply="8 V ~ 38 V"
U6: "IC TXRX RS485/RS422 10-UMAX", Supplier Part Number 1=MAX1484EUB+-ND, Supplier 1=Digi-Key
U7: library part CMP-0809-00006-2, "Precision, Low Noise, Rail-to-Rail Output, Zero-Drift Operational Amplifier, 4 to 36 V, -40 to 125 degC, 5-pin SOT23 (DBV5), Green (RoHS & no Sb/Br)", Manufacturer="Texas Instruments", Rating=Catalog, Total Supply Voltage(Max)(+5V is 5, +/-5V is 10)=36, Total Supply Voltage(Min)(+5V is 5, +/-5V is 10)=4, CMRR(Min)(dB)=120, Code_JEDEC=MO-178, ComponentLink1Description="Manufacturer URL", ComponentLink1URL=http://www.ti.com/, ComponentLink2Description=Datasheet, ComponentLink2URL=http://www.ti.com/lit/ds/symlink/opa188.pdf, ComponentLink3Description="Package Specification", ComponentLink3URL=http://www.ti.com/litv/pdf/mpds018i, DatasheetVersion=SBOS642A, Eco-Plan="Green (RoHS & no Sb/Br)", GBW(Typ)(MHz)=2, Iq per channel(Max)(mA)=0.51, Mounting Technology="Surface Mount", Number of Channels=1, Offset Drift(Typ)(uV/C)=0.03, PackageDescription="5-Pin Plastic Small Outline, Body 1.6 x 2.9 mm, Pitch 0.95 mm", PackageReference=DBV0005A, PackageVersion="4073253-4/K, 03/2006", PartNumber=OPA188AIDBVT, Slew Rate(Typ)(V/us)=0.8, SubFamily="Zero Drift Precision Amplifier"
U8: Base Part Number=LTC6994, Manufacturer="Linear Technology/Analog Devices", Manufacturer Part Number=LTC6994CS6-2#TRMPBF, Operating Temperature="0°C ~ 70°C", Package / Case="SOT-23-6 Thin, TSOT-23-6", Supplier Device Package=TSOT-23-6, Supplier Part Number 1=LTC6994CS6-2#TRMPBFCT-ND, Voltage - Supply="2.25 V ~ 5.5 V", Available Total Delays="1µs ~ 33.6s", Category="Integrated Circuits (ICs)", ComponentLink1Description=http://www.linear.com/docs/29725, ComponentLink1URL=http://www.linear.com/docs/29725, Delay to 1st Tap=-, Function=Programmable, Mounting Type="Surface Mount", Packaging="Cut Tape (CT)", Part Status=Active, Pricing 1="1=3.42, 25=3.0496, 100=1.9217, 250=1.76156 (USD)", RoHS="RoHS Compliant", Stock 1=1401, Supplier 1=Digi-Key
P7: Supplier 1=Avnet, Supplier Part Number 1=FSI-120-03-G-D-E-AB

## Free pads (board coordinates)
  round 60 hole 30: 2(711.61,-740)

## Via types
v1: diameter 50, hole 28, Top Layer to Bottom Layer, 39 vias
v2: diameter 19.68, hole 7.87, Top Layer to Bottom Layer, 36 vias

## Nets (pads, with @x,y where several pads share a name; then routed paths per layer and width w, separated by ;. In a path a pad name is that pad's centre, name@x,y a point inside that pad or via, vN(x,y) a via of type N, cw(c..) or ccw(c..) an arc to the next point about the centre after c; other vN are vias at no path point)
+3.3: C21.1 DS1.1 DS2.1 DS3.1 P4.3 P4.4 P6.1 P7.J2-3 P7.J2-4 R1.1 R2.1 R3.1 R4.1 R5.1 R6.1 R7.1 R8.1 R18.1 R19.1 R20.1 R21.1 R22.1 R23.1 R24.1 R25.1 U1.9-15 U6.10 U7.5 U8.5 | length 12331.5
  Top Layer w10: U1.9-15 -140,-660 -140,-583.43 -96.73,-540.16 -83.59,-540.16 -40.08,-496.65 -40.08,-483.51 3.43,-440 16.57,-440 130.61,-325.95 130.61,-309.39 150,-290 150,-210 P4.3@140,-200 ; v1(631,1079) 719.61,1079 ; DS1.1 743.04,909.69 743.04,1055.57 719.61,1079 ; DS3.1 917.48,897.49 917.48,1079 ; DS2.1@1078.03,895.99 1075.28,898.75 1075.28,1037.69 1033.97,1079 917.48,1079 ; v1(1370,-509.8) v1(1370,-410) ; 719.61,1079 917.48,1079
  Signal Layer 1 w10: v1(1255.69,-1546.2) 1251.39,-1541.89 1251.39,-874.31 v1(1247.08,-870) 1247.08,-632.72 v1(1370,-509.8)
  Signal Layer 2 w10: P4.4@140,-300 174.2,-300 302.99,-171.21 P6.1@638.93,-171.21 ; v1(607,637) 729.78,637 1240.79,125.99 1247.48,125.99 ; P6.1 650,-210 800,-360 v1(903,-360) 953,-410 v1(1370,-410) 1420,-360 v1(1420,120) 1414.01,125.99 1247.48,125.99 ; v1(1076,85.99) 1207.48,85.99 1247.48,125.99 ; v1(1255.69,-1546.2) 1265.23,-1546.2 1435.03,-1716 v1(1444.57,-1716) 1260,-1900.57 v1(1260,-2143.68) 1260,-2270 v1(1320,-2330)
  Bottom Layer w10: v1(607,637) 605.94,638.06 605.94,727.67 607,728.73 607,742.06 611.89,746.95 625.22,746.95 625.63,747.36 637.29,747.36 646.23,756.3 646.23,1089.15 644.15,1089.15 v1@634,1079 ; R24.1 R20.1 956.54,-931.14 983.27,-904.41 1137.41,-904.41 1222.41,-989.41 1241.73,-989.41 R18.1@1247.08,-994.76 ; R8.1 853.82,-2140.65 R7.1 946.85,-2131.79 973.58,-2105.06 1221.38,-2105.06 v1@1255.46,-2139.14 ; R25.1 R23.1 956.54,-1527.14 983.27,-1500.41 1209.91,-1500.41 1242.63,-1533.13 1242.63,-1542.67 v1@1242.37,-1542.93 ; R4.1@855.2,-342.87 855.2,-360 v1(903,-360) 908.4,-354.6 948.45,-354.6 956.54,-346.51 R3.1@956.54,-341.14 ; C21.1 912.91,90.56 927.48,75.99 U8.5 1066,75.99 v1(1076,85.99) ; R2.1 v1(1370,-509.8) ; R1.1 1230,-410 v1(1370,-410) 1370.08,-409.92 U7.5 ; v1(1247.08,-870) R18.1@1247.08,-994.76 ; R18.1 1247.08,-1003.61 R18.1@1247.08,-994.76 ; R6.1 1259.43,-2330 v1(1320,-2330) ; R22.1 v1(1444.57,-1716) ; R21.1 1255.69,-1615.77 v1(1255.69,-1546.2) ; R19.1 1255.46,-1121.65 1304.14,-1170.33 1580.13,-1170.33 1681.78,-1068.68 1681.78,-961.65 1783.43,-860 1796.57,-860 1840,-816.57 1840,-803.43 1883.43,-760 1916.57,-760 1940,-783.43 1940,-1016.57 1896.57,-1060 1883.43,-1060 1840,-1103.43 1840,-1116.57 1796.57,-1160 1641.89,-1160 1268.5,-1533.39 v1@1268.5,-1542.93 ; R5.1@1260,-2199.39 v1(1260,-2143.68) ; v1(1420,120) 1420,170.16 1422.66,172.82 U6.10
"+3.3 BBB": U1.9-3 U1.9-4 | length 100
  Bottom Layer w10: U1.9-3 U1.9-4
"+5 BBB": U1.9-5 U1.9-6 | length 100
  Bottom Layer w10: U1.9-5 U1.9-6
+12: C3.1 C6.2 C8.1 C10.2 C14.1 C15.1 C19.2 C20.2 P4.1 P4.2 pad.2 R10.1 R12.1 R28.1 R29.1 U2.14 U3.14 U4.14 U5.14 | length 6766.7
  Signal Layer 1 w10: P4.1@140,0 150,-10 150,-110 290,-250 v1(290,-454.87) 440,-604.87 v1@440,-1011.61 ; v1(150,-2250) 150,-2160 410,-1900 ; v1(707.48,-2544.01) 711.02,-2540.46 711.02,-1949.54 v1(714.57,-1946) 668.57,-1900 410,-1900 ; pad.2 711.61,-749.22 448.45,-1012.39 440.77,-1012.39 v1@440,-1011.61 ; v1(714.57,-1340) 710.56,-1344.01 440,-1344.01 ; 410,-1900 440,-1870 440,-1344.01 ; 440,-1344.01 v1@440,-1011.61
  Bottom Layer w10: v1(150,-2250) R12.1@315.03,-2250 ; R28.1@271.73,-1034.8 435.26,-1034.8 v1(440,-1030.06) 732.53,-1030.06 764.08,-1061.61 U4.14 ; v1(290,-454.87) 290,-525.98 300.59,-536.57 373.71,-536.57 464.61,-445.66 612.21,-445.66 626.35,-459.8 U2.14 ; R29.1 314.89,-1637.43 v1(410,-1637.43) ; R12.1 397,-2247.98 405.03,-2256.01 ; 386.47,-2250 399.39,-2250 405.03,-2255.65 751.1,-2255.65 763.07,-2267.61 U3.14 ; C15.1 410,-1715.6 v1(410,-1637.43) ; v1@709.6,-2541.44 707.48,-2539.32 707.48,-2473.56 C10.2 ; pad.2 711.61,-662.95 C6.2 ; v1(714.57,-1946) C20.2 ; v1(714.57,-1340) C19.2 ; U5.14 767.08,-1664.61 739.89,-1637.43 v1(410,-1637.43)
"Arrestment Heater FET": U1.8-3
"Blue LED": P7.J2-14 R39.1 | length 167.7
  Bottom Layer w10: P7.J2-14@1040.23,767.96 1038.29,769.9 1038.29,854.72 1088.71,905.14 R39.1
CLK+: P6.4 U6.8 | length 764.4
  Bottom Layer w10: P6.4@951.57,-167.57 1070.62,-48.53 1300.97,-48.53 1462.79,113.29 1462.79,206.13 1444.91,224 U6.8
CLK-: P6.5 U6.7 | length 727.8
  Bottom Layer w10: P6.5@1043.05,-175.17 1043.05,-172.95 1152.47,-63.53 1307.18,-63.53 1477.79,107.08 1477.79,216.72 1444.91,249.59 U6.7
"Conning Tower FET": U1.8-4
DTA+: P6.3 U6.9 | length 727.2
  Bottom Layer w10: P6.3 946.4,-69.6 1028.34,-69.6 1090.42,-7.52 1201.58,-7.52 1407.51,198.41 U6.9
DTA-: P6.6 U6.6 | length 670.8
  Bottom Layer w10: P6.6@1150.75,-179 1158.54,-171.21 1220.71,-171.21 1492.79,100.86 1492.79,227.31 1444.91,275.18 U6.6
Encoder_Enable: R34.2 U6.3 U7.1 | length 994.5
  Top Layer w10: v1(1057.48,185.99) 1270,185.99 1367.48,88.51 v1(1367.48,-114.01)
  Bottom Layer w10: v1(1057.48,185.99) 1095.49,224 U6.3 ; v1(1367.48,-114.01) 1368.78,-115.31 1368.78,-172.51 U7.1 1370.08,-178.73 1400.16,-208.81 1511.5,-208.81 R34.2
"Gearbox Heater FET": U1.8-6
GND: C1.2 C3.2 C4.2 C5.2 C8.2 C9.2 C11.2 C12.2 C14.2 C15.2 C17.2 C18.2 C21.2 P6.2 P7.J2-1 P7.J2-2 R13.2 R14.2 R15.2 R16.2 R17.2 R30.2 R31.2 R32.2 R33.2 R37.2 U1.8-1 U1.8-2 U1.9-1 U1.9-2 U1.9-43 U1.9-44 U1.9-45 U1.9-46 U2.4 U2.13 U2.17 U3.4 U3.13 U3.17 U4.4 U4.13 U4.17 U5.4 U5.13 U5.17 U6.5 U7.2 U7.3 U8.2 U8.4 | length 971.5
  Bottom Layer w10: U3.13 887.2,-2293.2 v2(900,-2306) 912.8,-2293.2 U3.4 ; U4.13 887.2,-1087.2 v2(900,-1100) 912.8,-1087.2 U4.4 ; U2.13 887.2,-485.39 v2(900,-498.18) 912.8,-485.39 U2.4 ; U5.13 890.2,-1690.2 v2(903,-1703) 915.8,-1690.2 U5.4
  other v2: 856.69,-2349.31 900,-2349.31 943.31,-2349.31 856.69,-2306 943.31,-2306 856.69,-2262.69 900,-2262.69 943.31,-2262.69 859.69,-1746.31 903,-1746.31 946.31,-1746.31 859.69,-1703 946.31,-1703 859.69,-1659.69 903,-1659.69 946.31,-1659.69 856.69,-1143.31 900,-1143.31 943.31,-1143.31 856.69,-1100 943.31,-1100 856.69,-1056.69 900,-1056.69 943.31,-1056.69 856.69,-541.49 900,-541.49 943.31,-541.49 856.69,-498.18 943.31,-498.18 856.69,-454.87 900,-454.87 943.31,-454.87
"Green LED": P7.J2-13 R40.1 | length 180.1
  Bottom Layer w10: R40.1 918.71,905.14 998.89,824.96 998.89,769.9 P7.J2-13@1000.83,767.96
Heartbeat: U1.9-42
"Meter Heater FET": U1.8-5
"MUX D2": U1.8-16
MUX_D0: U1.8-14
MUX_D1: U1.8-15
NetC1_1: C1.1 R9.1 | length 61.1
  Bottom Layer w10: R9.1 534.25,-367.38 C1.1@534.25,-310
NetC2_1: C2.1 U2.12 | length 213
  Bottom Layer w10: C2.1 585.43,-490.11 606.3,-510.98 U2.12
NetC2_2: C2.2 U2.11 | length 285.2
  Bottom Layer w10: C2.2@514.57,-498.18 522.64,-498.18 561.02,-536.57 U2.11
NetC4_1: C4.1 R11.1 | length 68.4
  Bottom Layer w10: C4.1 539.28,-2169.16 R11.1
NetC5_1: C5.1 R10.2 | length 81.1
  Bottom Layer w10: C5.1@290,-670 R10.2@290,-588.9
NetC6_1: C6.1 U2.9 | length 72.9
  Bottom Layer w10: U2.9 783.86,-658.43 C6.1
NetC7_1: C7.1 U3.12 | length 72.7
  Bottom Layer w10: C7.1 719.11,-2318.8 U3.12 U3.12@782.8,-2317.73
NetC7_2: C7.2 U3.11 | length 69.9
  Bottom Layer w10: C7.2 715.93,-2344.39 U3.11
NetC9_1: C9.1 R12.2 | length 72.4
  Bottom Layer w10: C9.1 315.03,-2382.83 R12.2
NetC10_1: C10.1 U3.9 | length 77.3
  Bottom Layer w10: C10.1 783.86,-2468.05 U3.9
NetC11_1: C11.1 R26.1 | length 61.1
  Bottom Layer w10: R26.1 534.25,-977.38 C11.1@534.25,-920
NetC12_1: C12.1 R27.1 | length 60.8
  Bottom Layer w10: C12.1 525.82,-1583.99 R27.1
NetC13_1: C13.1 U4.12 | length 212.5
  Bottom Layer w10: C13.1 585.43,-1093.11 605.12,-1112.8 U4.12
NetC13_2: C13.2 U4.11 | length 288.2
  Bottom Layer w10: C13.2@511.54,-1100 521.46,-1100 559.84,-1138.39 U4.11
NetC16_1: C16.1 U5.12 | length 202.2
  Bottom Layer w10: C16.1 598.43,-1696.91 616.07,-1714.54 785.61,-1714.54 U5.12
NetC16_2: C16.2 U5.11 | length 273.9
  Bottom Layer w10: C16.2@527.57,-1706 536.66,-1706 572.05,-1741.39 U5.11
NetC17_1: C17.1 R28.2 | length 78.7
  Bottom Layer w10: R28.2 C17.1
NetC18_1: C18.1 R29.2 | length 69.1
  Bottom Layer w10: C18.1@310,-1768.53 R29.2
NetC19_1: C19.1 U4.9 | length 81.1
  Bottom Layer w10: U4.9 783.86,-1268.43 C19.1
NetC20_1: C20.1 U5.9 | length 74
  Bottom Layer w10: C20.1 786.86,-1864.57 U5.9
NetDS1_2: DS1.2 R38.2 | length 260.8
  Top Layer w10: DS1.2 v1(693.75,1035.99)
  Bottom Layer w10: R38.2 693.75,915.97 v1@693.75,1034
NetDS2_2: DS2.2 R39.2 | length 267.9
  Top Layer w10: DS2.2@1015.04,895.99 1027.48,908.43 v1(1027.48,1035.99)
  Bottom Layer w10: R39.2 1027.48,919.7 1027.48,1032.98 v1@1028.5,1034
NetDS3_2: DS3.2 R40.2 | length 260.2
  Top Layer w10: v1(854.8,1034) 854.8,897.17 DS3.2
  Bottom Layer w10: R40.2 854.8,917.02 854.8,1032.94 v1@853.75,1034
NetP1_1: P1.1 U3.7 | length 1300.7
  Top Layer w10: P1.1 259.45,-2335.45 503.01,-2579.01 970.99,-2579.01 v1(1100,-2450)
  Bottom Layer w10: U3.7 1035.92,-2369.98 1092.35,-2426.4 1092.35,-2442.35 v1(1100,-2450)
NetP1_2: P1.2 U3.10 | length 637.6
  Top Layer w10: P1.2 485.03,-2281.58 v1(485.03,-2421.44)
  Bottom Layer w10: v1(485.03,-2421.44) 712.61,-2421.44 764.08,-2369.98 U3.10
NetP2_1: P2.1 U5.7 | length 582.5
  Bottom Layer w10: U5.7 1038.92,-1766.98 1427.94,-2156 P2.1
NetP2_2: P2.2 U5.10 | length 1328.1
  Top Layer w10: v1(640,-2006) 1463.82,-2006 1540.55,-2082.73 P2.2
  Bottom Layer w10: v1(640,-2006) 640,-1875.24 697.22,-1818.02 716.03,-1818.02 767.08,-1766.98 U5.10
NetP3_1: P3.1 U2.7 | length 749.9
  Top Layer w10: P3.1@1440.77,-1124.9 v1(1440.77,-1006)
  Bottom Layer w10: U2.7 1035.92,-562.16 1439.76,-966 1439.76,-1001.2 v1(1440.77,-1006)
NetP3_2: P3.2 U2.10 | length 1378.6
  Top Layer w10: v1(620,-600) 1120,-600 1540.55,-1020.55 P3.2
  Bottom Layer w10: v1(620,-600) 726.24,-600 764.08,-562.16 U2.10
NetP5_1: P5.1 U4.7 | length 1249.7
  Bottom Layer w10: P5.1 259.45,-1349.45 330,-1420 914.63,-1420 1053.7,-1280.93 1053.7,-1181.76 1035.92,-1163.98 U4.7
NetP5_2: P5.2 U4.10 | length 440.6
  Bottom Layer w10: P5.2 389.88,-1155.33 754.42,-1155.33 763.07,-1163.98 U4.10
NetR1_2: R1.2 R13.1 U2.2 | length 265.1
  Bottom Layer w10: U2.2 1141.34,-434.2 1153.07,-422.47 R1.2 1155.07,-418 R13.1
NetR2_2: R2.2 U2.5 | length 137.4
  Bottom Layer w10: U2.5 1151.89,-510.98 R2.2
NetR3_2: R3.2 U1.8-9 U2.1 | length 856.7
  Top Layer w10: v1(1100,-360) 1760,-360 U1.8-9
  Bottom Layer w10: U2.1 1016.14,-354.6 1094.6,-354.6 v1(1100,-360)
NetR4_2: R4.2 U2.16 | length 71.6
  Bottom Layer w10: R4.2 783.86,-347.32 U2.16
NetR5_2: R5.2 U3.2 | length 186.7
  Bottom Layer w10: U3.2 1017.6,-2240.57 1176.8,-2240.57 1188.54,-2228.83 R5.2
NetR6_2: R6.2 U3.5 | length 175.3
  Bottom Layer w10: U3.5 1181.3,-2318.8 R6.2
NetR7_2: R7.2 U1.8-27 U3.1 | length 1369.5
  Signal Layer 1 w10: v1(1076,-2143.68) 1163.68,-2056 1310,-2056 1758.46,-1607.54 1758.46,-1341.54 U1.8-27
  Bottom Layer w10: U3.1 1016.14,-2143.01 R7.2 1016.81,-2143.68 v1(1076,-2143.68)
NetR8_2: R8.2 U3.16 | length 76.5
  Bottom Layer w10: U3.16 783.86,-2143.68 R8.2
NetR9_2: R9.2 U2.15 | length 217.1
  Bottom Layer w10: R9.2 598.56,-378.86 653.91,-434.2 U2.15
NetR11_2: R11.2 U3.15 | length 219.3
  Bottom Layer w10: R11.2@601.76,-2164.71 601.76,-2173.57 668.84,-2240.65 782.48,-2240.65 U3.15
NetR14_1: R14.1 U1.8-12 U2.6 | length 983.1
  Bottom Layer w10: U2.6 1108.5,-536.57 1153.07,-581.14 1153.07,-598.86 1179.8,-625.59 1717.84,-625.59 1783.43,-560 1840,-560 U1.8-12
NetR15_1: R15.1 U2.8 | length 63.4
  Bottom Layer w10: R15.1 1016.14,-647.32 U2.8
NetR16_1: R16.1 U1.8-38 U3.6 | length 1682.6
  Bottom Layer w10: U3.6 1137.82,-2344.39 1188.5,-2395.07 R16.1 ; R16.1 1188.54,-2412.82 1275.72,-2500 1500,-2500 1856,-2500 1960,-2396 1960,-1860 U1.8-38
NetR17_1: R17.1 U3.8 | length 61.5
  Bottom Layer w10: R17.1@1013.46,-2456 1016.14,-2453.32 U3.8
NetR18_2: R18.2 U4.2 | length 186.4
  Bottom Layer w10: U4.2 1169.37,-1036.02 1186.54,-1018.86 R18.2
NetR19_2: R19.2 U4.5 | length 172.4
  Bottom Layer w10: U4.5 R19.2
NetR20_2: R20.2 U1.8-30 U4.1 | length 1138.6
  Top Layer w10: v1(1090,-940) 1490,-1340 1840,-1340 U1.8-30
  Bottom Layer w10: R20.2@1013.46,-940 1016.14,-942.68 U4.1 ; R20.2 v1(1090,-940)
NetR21_2: R21.2 U5.2 | length 184.1
  Bottom Layer w10: U5.2 1174.37,-1639.02 1188.54,-1624.86 R21.2
NetR22_2: R22.2 U5.5 | length 169.8
  Bottom Layer w10: U5.5 1188.69,-1715.8 R22.2@1188.89,-1716
NetR23_2: R23.2 U1.8-10 U5.1 | length 1819.9
  Signal Layer 1 w10: v1(1080,-1540) 1121.2,-1581.2 1270.19,-1581.2 1585.98,-1265.4 1585.98,-657.45 1783.43,-460 1840,-460 U1.8-10
  Bottom Layer w10: U5.1 1023.46,-1609.11 R23.2 1027.46,-1540 v1(1080,-1540)
NetR24_2: R24.2 U4.16 | length 71.5
  Bottom Layer w10: U4.16 783.86,-942.68 R24.2@786.54,-940
NetR25_2: R25.2 U5.16 | length 77.6
  Bottom Layer w10: R25.2 786.86,-1536.32 U5.16
NetR26_2: R26.2 U4.15 | length 213.7
  Bottom Layer w10: R26.2 598.56,-988.86 610.3,-1000.59 728.64,-1000.59 764.08,-1036.02 U4.15
NetR27_2: R27.2 U5.15 | length 219.3
  Bottom Layer w10: R27.2 594.76,-1594.86 606.49,-1606.59 734.64,-1606.59 767.08,-1639.02 U5.15
NetR30_1: R30.1 U1.8-18 U4.6 | length 1156
  Bottom Layer w10: U4.6 1146.21,-1138.39 1188.54,-1180.71 1188.54,-1198.43 1215.27,-1225.16 1546.51,-1225.16 1696.78,-1074.89 1696.78,-1046.65 1783.43,-960 1796.57,-960 1843.5,-913.07 1843.5,-856.5 U1.8-18
NetR31_1: R31.1 U4.8 | length 71.5
  Bottom Layer w10: R31.1@1013.46,-1260 1016.14,-1257.32 U4.8
NetR32_1: R32.1 U1.8-36 U5.6 | length 1068.3
  Top Layer w10: v1(1186.54,-1860) 1514.43,-1860 1721.43,-1653 1880.81,-1653 U1.8-36@1899.34,-1671.53
  Bottom Layer w10: U5.6 1142.78,-1741.39 1188.54,-1787.14 R32.1 1186.54,-1798 v1(1186.54,-1860)
NetR33_1: R33.1 U5.8 | length 64.5
  Bottom Layer w10: R33.1@1016.54,-1856 1019.14,-1853.39 U5.8
NetR34_1: R34.1 R35.2 U7.4 | length 148.1
  Bottom Layer w10: U7.4 1509.97,-274.2 R34.1 R35.2
NetR37_1: R37.1 U8.3 | length 77.1
  Bottom Layer w10: R37.1 783.54,113.39 U8.3
NetU1_8-7: U1.8-7
NetU1_8-8: U1.8-8
NetU1_8-11: U1.8-11 U2.3 | length 800.5
  Bottom Layer w10: U2.3 1759.8,-459.8 U1.8-11
NetU1_8-13: U1.8-13
NetU1_8-17: U1.8-17 U4.3 | length 892.2
  Bottom Layer w10: U4.3 1538.39,-1061.61 U1.8-17
NetU1_8-19: U1.8-19
NetU1_8-22: U1.8-22
NetU1_8-23: U1.8-23
NetU1_8-25: U1.8-25
NetU1_8-26: U1.8-26
NetU1_8-28: U1.8-28
NetU1_8-31: U1.8-31
NetU1_8-32: U1.8-32
NetU1_8-33: U1.8-33
NetU1_8-34: U1.8-34
NetU1_8-35: U1.8-35 U5.3 | length 795.5
  Bottom Layer w10: U5.3 1764.61,-1664.61 U1.8-35
NetU1_8-37: U1.8-37 U3.3 | length 1119
  Bottom Layer w10: U3.3 1573.93,-2267.61 1683.1,-2158.45 1683.1,-1916.9 U1.8-37
NetU1_8-42: U1.8-42
NetU1_8-43: U1.8-43
NetU1_8-44: U1.8-44
NetU1_9-9: U1.9-9
NetU1_9-16: U1.9-16
PWM1A: U1.9-14
"Red LED": P7.J2-11 R38.1 | length 231.8
  Bottom Layer w10: R38.1 758.71,905.14 770.44,893.41 801.41,893.41 922.03,772.79 P7.J2-11@922.03,767.96
RS232_RX: R43.1 U1.9-11 | length 1728.5
  Top Layer w10: U1.9-11@-95.24,-502.39 -95.24,-495.24 -46,-446 -46,25 256.99,327.99 543.38,327.99 866.54,651.14 R43.1
RS232_TX: R42.1 U1.9-13 | length 1567.4
  Top Layer w10: U1.9-13@-99.97,-603.96 U1.9-13 -40,-540 16.57,-540 854.8,298.24 854.8,518.27 R42.1
RXD: P7.J2-18 R43.2 | length 356.3
  Top Layer w10: R43.2@933.46,650 943.46,660 v1(1200,660)
  Bottom Layer w10: P7.J2-18 1197.94,745.3 1197.94,678.48 1205.92,670.5 v1@1210.5,670.5
Serial1_RX: U1.9-26
Serial1_TX: U1.9-24
SPI0_CS0: U1.9-17
"SPI0_CS0_MUX A2": U1.8-41
SPI0_CS0_MUX_A0: U1.8-39
SPI0_CS0_MUX_A1: U1.8-40
SPI0_MISO: R36.1 U1.9-21 U8.1 | length 1652.6
  Top Layer w10: U1.9-21 -40,-940 16.57,-940 110,-846.57 110,-546 681.99,25.99 v1(747.48,25.99)
  Bottom Layer w10: v1(747.48,25.99) 754.25,32.76 851.14,32.76 U8.1 866.46,38.59 872.28,32.76 872.28,-22.28 R36.1
SPI0_MISO_DELAY: R36.2 U6.1 U8.6 | length 414
  Bottom Layer w10: R36.2 962.68,-22.28 962.68,32.76 968.5,38.59 1112.85,38.59 U6.1
SPI0_MOSI: U1.9-18
SPI0_SCLK: U1.9-22 U6.4 | length 2190
  Bottom Layer w10: U1.9-22 210,-790 210,-64.01 523.6,249.59 U6.4
SPI1_CS0: R35.1 U1.9-28 U6.2 | length 3569.6
  Signal Layer 2 w10: U1.9-28 1476,-1300 1587.48,-1188.52 v1(1587.48,-144.01)
  Bottom Layer w10: U6.2 1289.9,198.41 1336.76,245.27 1336.76,269.39 1360.42,293.05 1560.42,293.05 1587.48,265.99 R35.1
SPI1_MISO: U1.9-29
SPI1_MOSI: U1.9-30
SPI1_SCLK: U1.9-31
TXD: P7.J2-16 R41.2 R42.2 | length 383.1
  Top Layer w10: R42.2 R41.2
  Bottom Layer w10: v1(990,530) 1117.09,657.09 P7.J2-16
VCC_2V85: P7.J3-20 R41.1 | length 299
  Top Layer w10: R41.1 v1(1303.18,530)
  Bottom Layer w10: P7.J3-20 1274.3,501.12 v1(1303.18,530)